# Altium PCB ZCTX-31main190715.PcbDoc (part 1 of 2)
Units mil, origin at the board's own origin, x right, y up, seen from the top; angles counter-clockwise.
Board outline 3653.54 x 5905.51 mil, 4 copper layers (Top Layer, GND, Mid-Layer 1, Bottom Layer); 117 components, 93 nets, 498 pads, 925 vias.
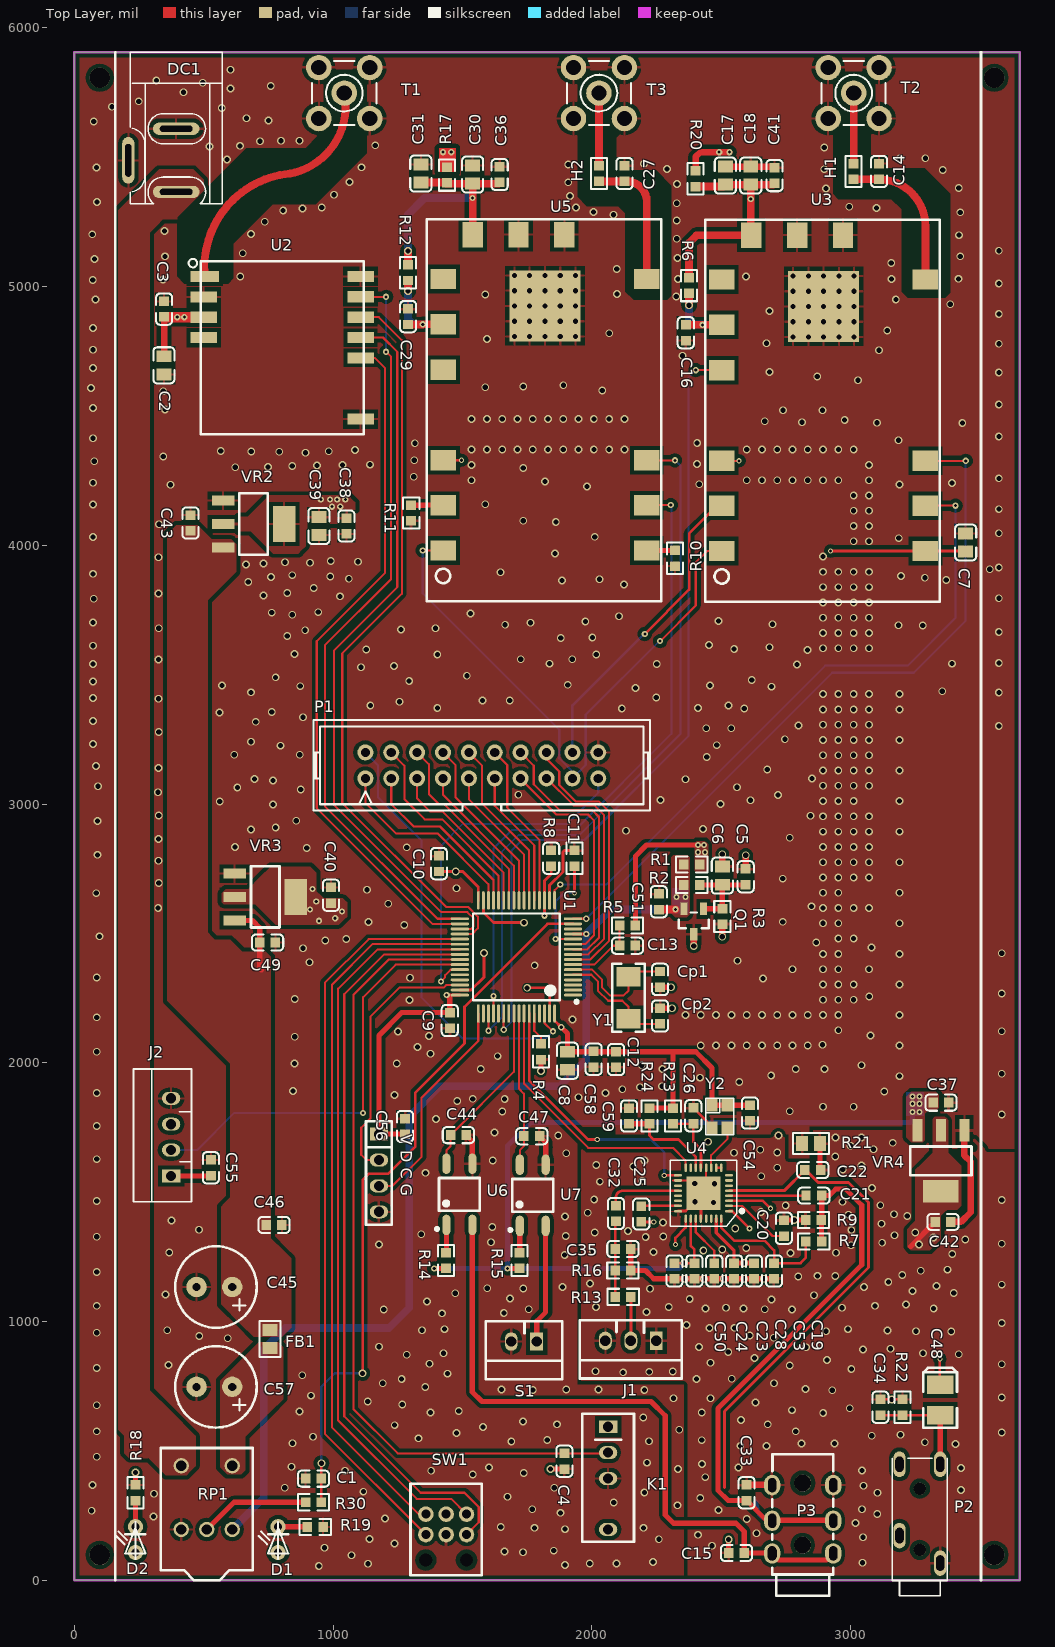
[diagram p0: Top Layer view]
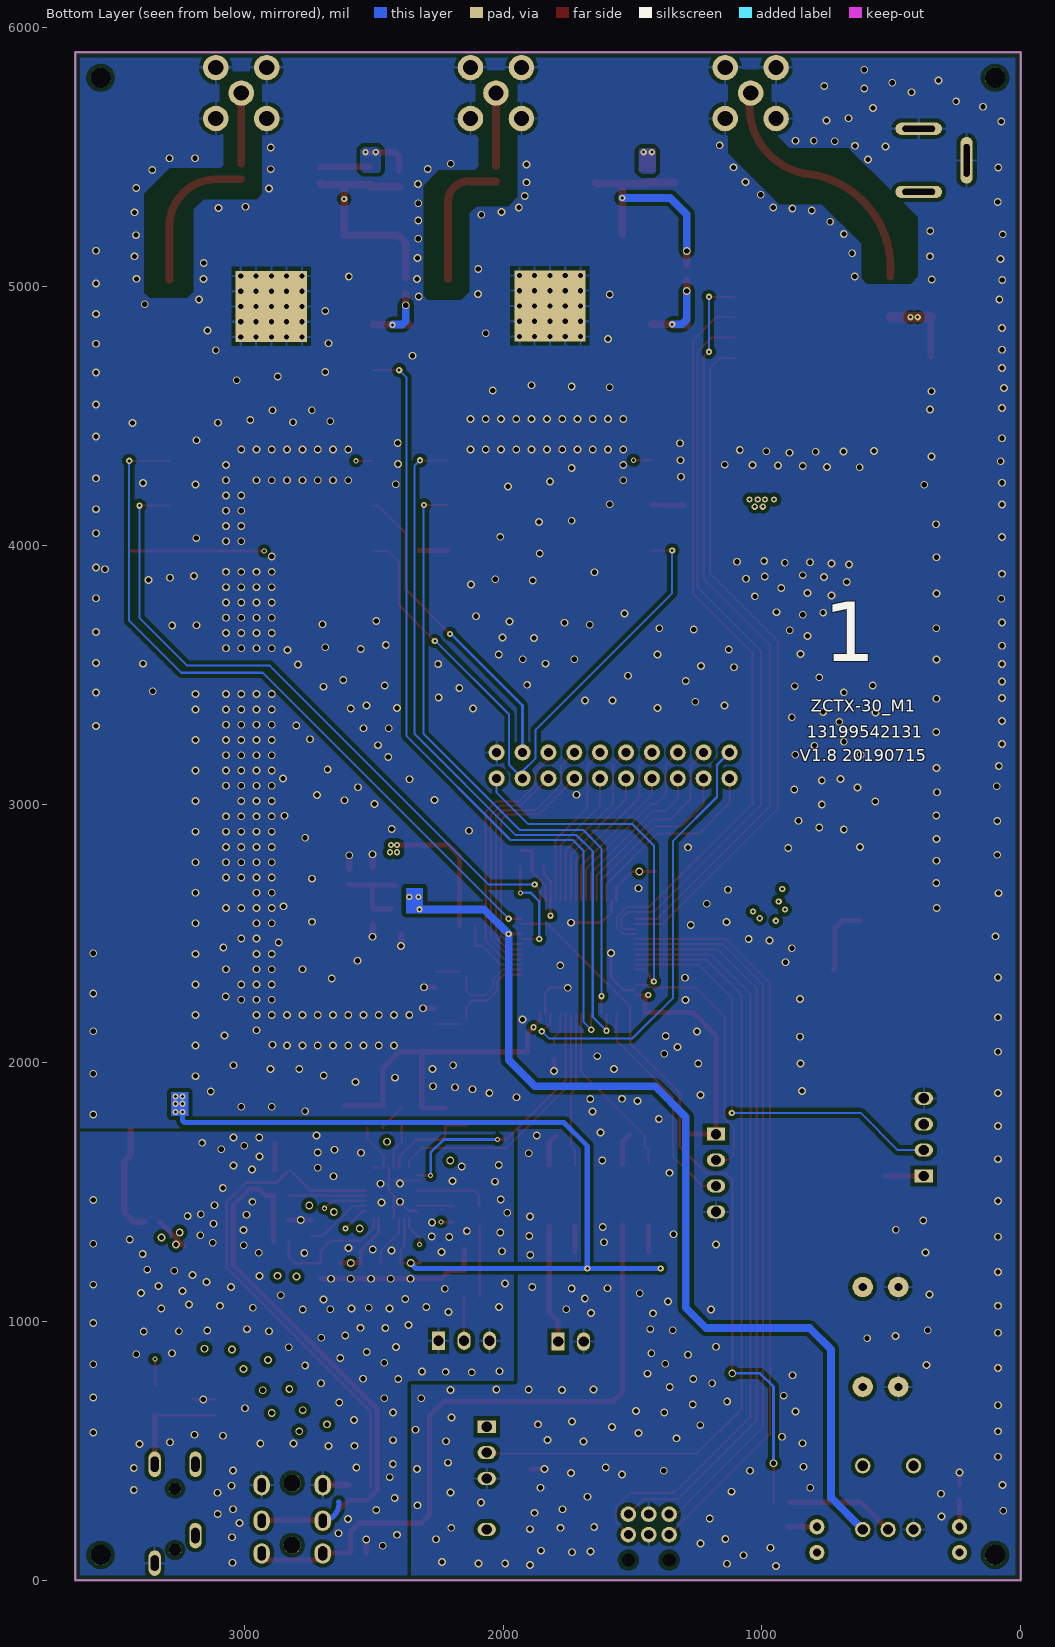
[diagram p1: Bottom Layer view, seen from below]
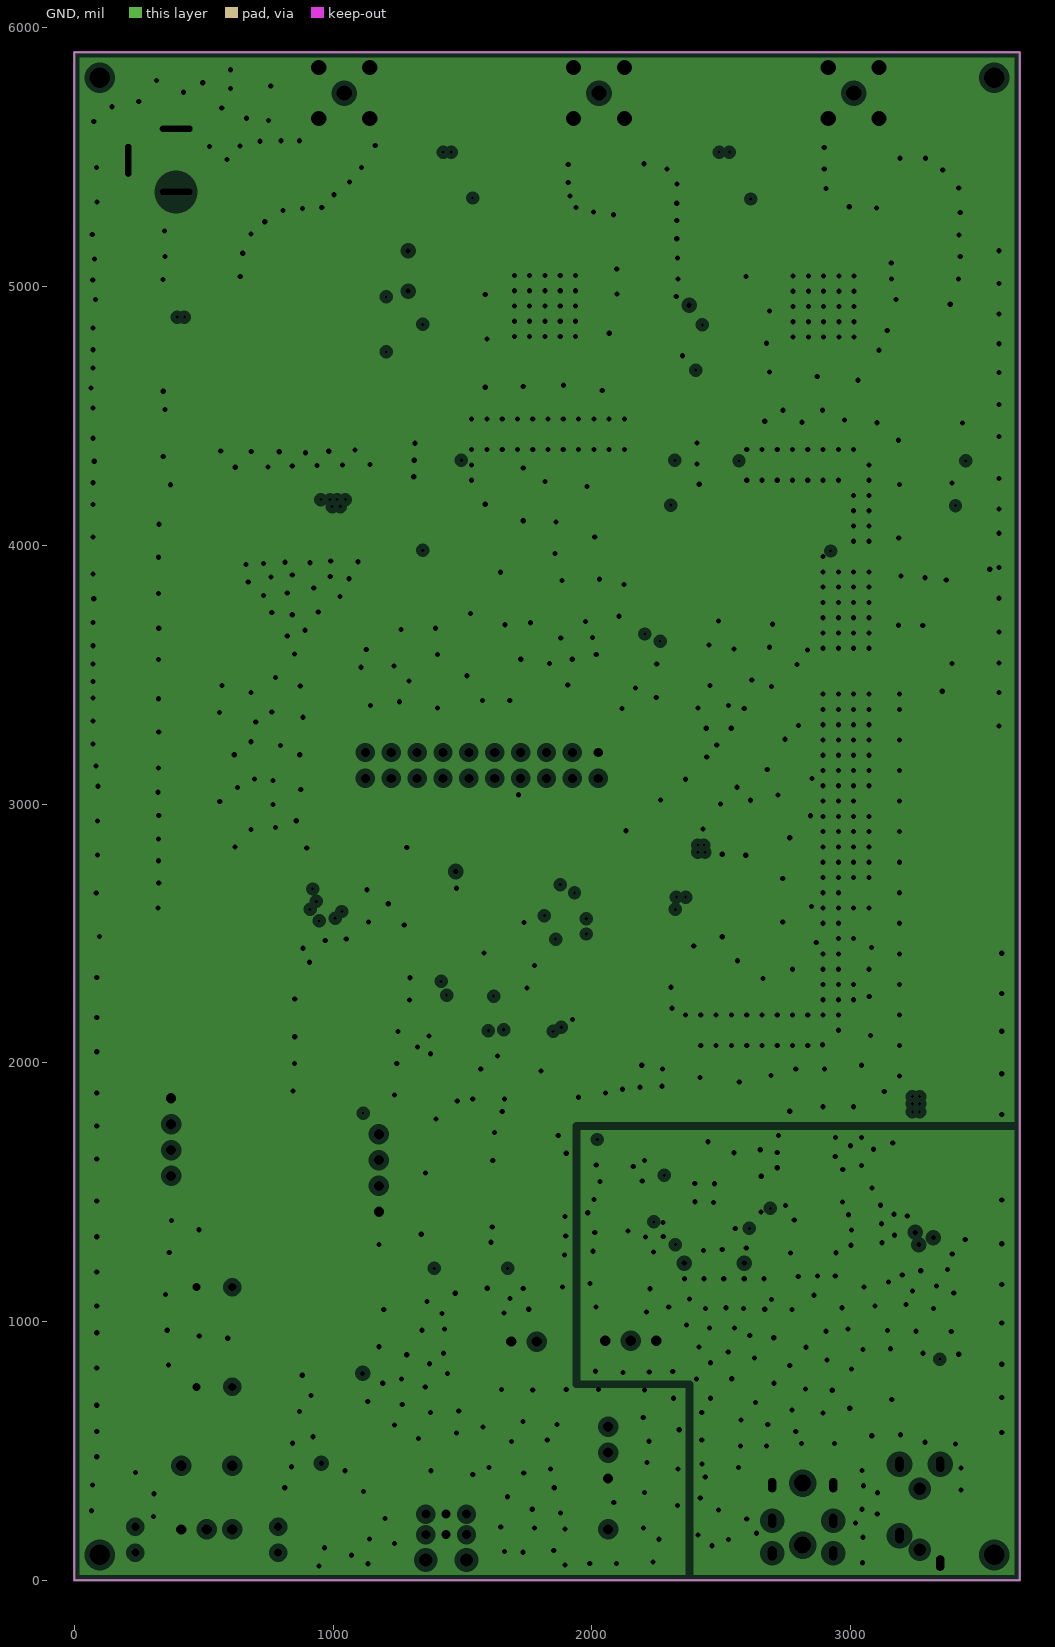
[diagram p2: GND, clearances drawn from the general rule]
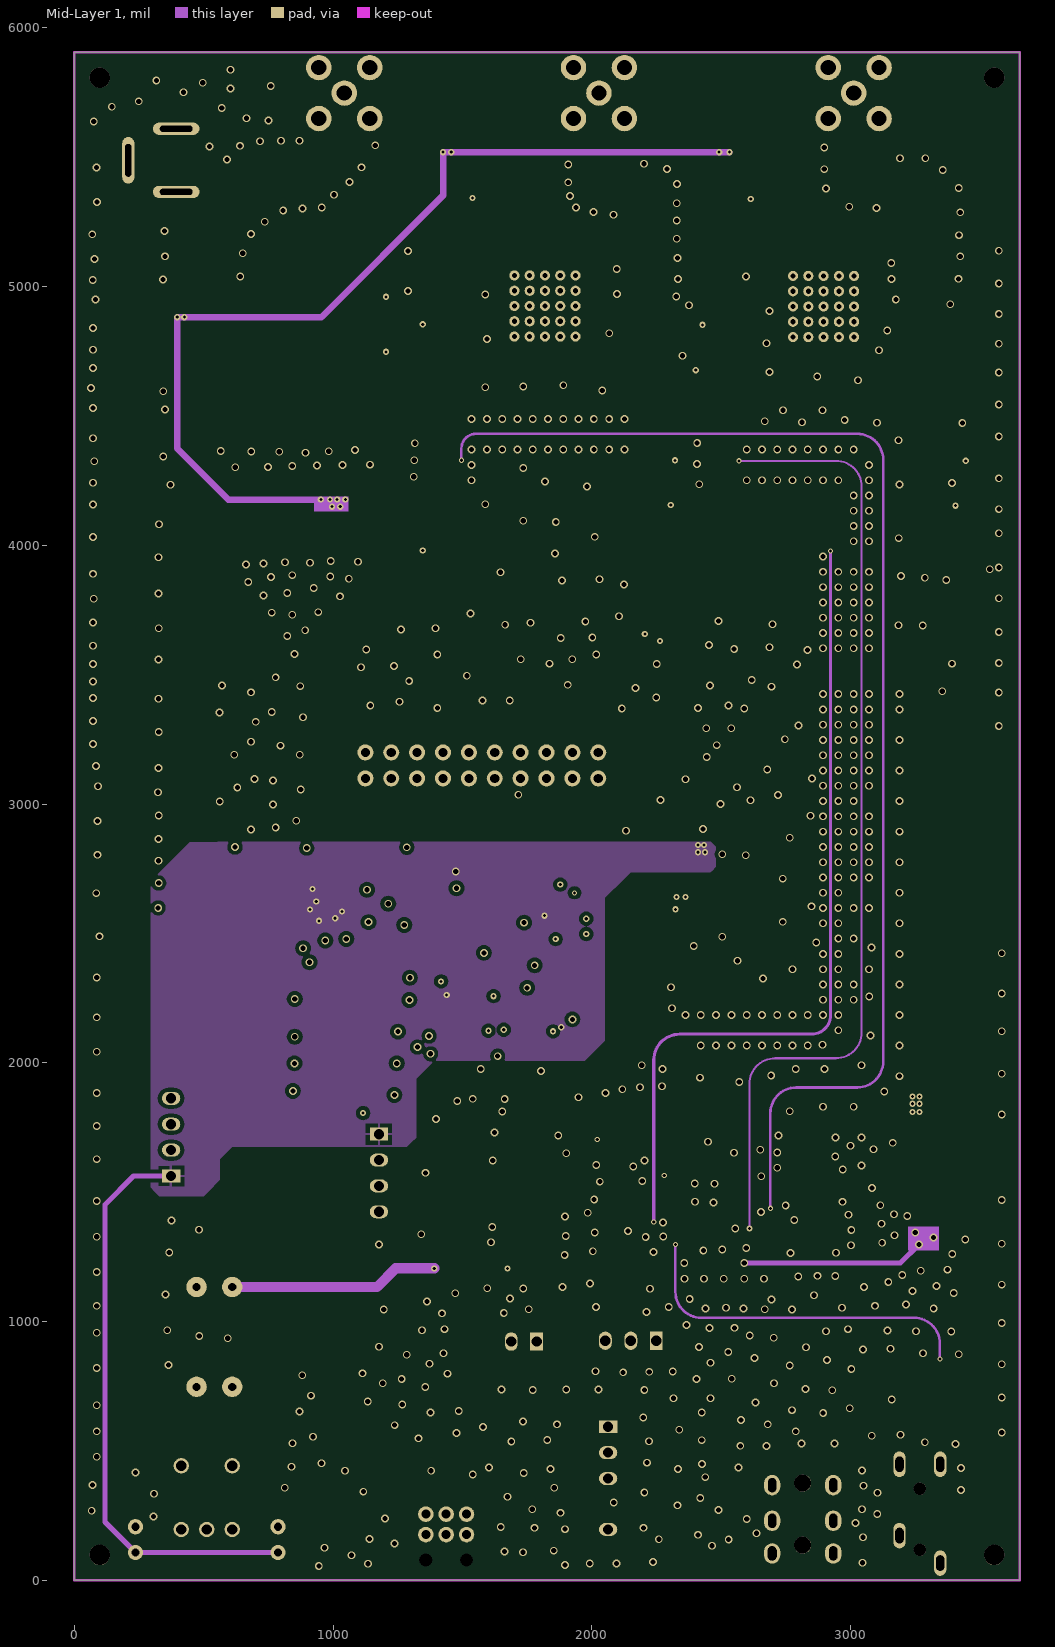
[diagram p3: Mid-Layer 1]
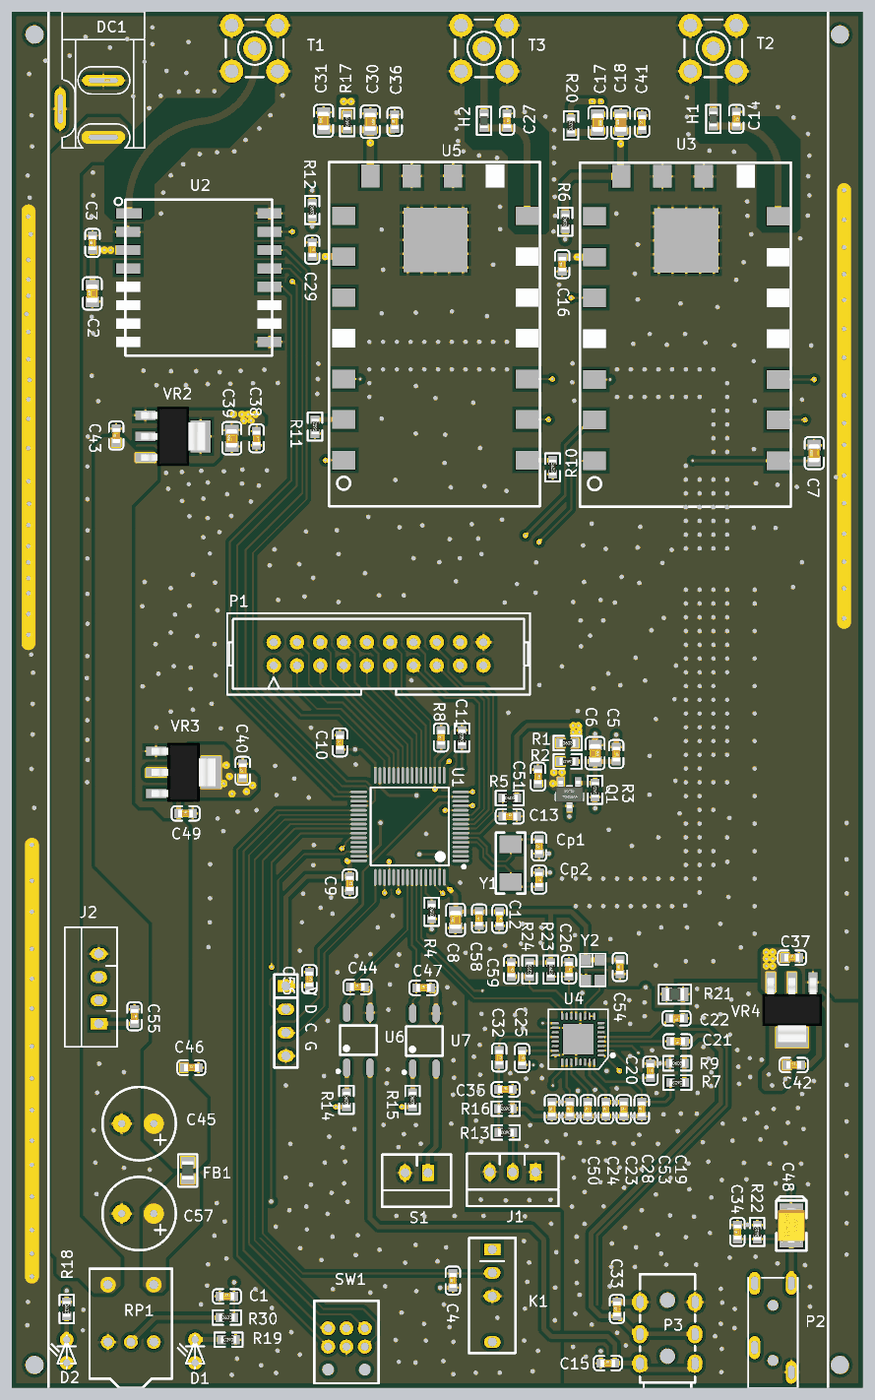
[diagram p5: 3D render of the assembled board from above, using the file's embedded part models]

## Layer stack, top to bottom
Top Layer: signal copper 1.4
Dielectric: core 12.6, FR-4, Dk 4.8
GND: plane copper 1.4, net (Multiple Nets)
Dielectric: prepreg 12.6, FR-4, Dk 4.8
Mid-Layer 1: signal copper 1.4
Dielectric: core 12.6, FR-4, Dk 4.8
Bottom Layer: signal copper 1.4

## Board outline
0,0 3653.54,0 3653.54,5905.51 0,5905.51

## Design rules (kind name [scope] priority, off if disabled: settings)
Clearance Clearance_1 [IsRegion] p1: gap=15
Clearance [All] p2: gap=5
DiffPairsRouting [All] p1: maxlimit=10 minlimit=10 mostfreqgap=10 maxuncoupledlength=500
FabricationTestpoint [(IsPad And (OnTopLayer Or OnBottomLayer))] p1: side=3 testpointundercomponent=TRUE minsize=40 maxsize=100 preferedsize=60 minholesize=0 maxholesize=40 preferedholesize=32 testpointgrid=1 allowsidetop=TRUE allowsidebottom=TRUE usegrid=TRUE gridtolerance=0.01
HoleSize [All] p1: absolutevalues=TRUE maxlimit=393.7 minlimit=1 maxpercent=80.000 minpercent=20.000
PlaneClearance [All] p1: clearance=20
PlaneConnect [All] p1: planeconnectstyle=Relief reliefexpansion=20 reliefentries=4 reliefconductorwidth=12 reliefairgap=10
PolygonConnect PolygonConnect_1 [IsVia] p1: connectstyle=Direct reliefconductorwidth=10 reliefentries=4 polygonreliefangle="90 Angle"
PolygonConnect [All] p2: connectstyle=Relief reliefconductorwidth=10 reliefentries=4 polygonreliefangle="90 Angle"
RoutingVias [All] p1: holewidth=12 width=24 viastyle="Through Hole" minholewidth=12 minwidth=24 maxholewidth=12 maxwidth=24
SilkscreenOverComponentPads SilkToSolderMaskClearance [IsPad] p1: minsilkscreentomaskgap=10
SolderMaskExpansion [All] p1: expansion=3.94
Width [All] p1: maxlimit=118.11 minlimit=6.69 preferedwidth=10 toplayer_minwidth=8 toplayer_maxwidth=100 toplayer_prefwidth=8 bottomlayer_minwidth=8 bottomlayer_maxwidth=100 bottomlayer_prefwidth=8
22 further rules are at their usual default settings.

## Classes and differential pairs
differential pair WM8978MIC: +WM8978MIC_P -WM8978MIC_N

## Components (designator, comment, footprint, x,y, rotation, side; value= is the part's Value field where it differs from the comment)
C1 "100nF (104) 10% 50V" 0603_C 924,393 r0 top
C2 "10uF (106) 10% 25V" 0805_C 346,4696 r90 top
C3 "100nF (104) 10% 50V" 0603_C 347,4913 r90 top
C4 "100nF (104) 10% 50V" 0603_C 1893.7,460.63 r90 top
C5 "100nF (104) 10% 50V" 0603_C 2594.81,2719.54 r270 top
C6 "10uF (106) 10% 25V" 0805_C 2504.26,2723.47 r270 top
C7 "100nF (104) 10% 50V" LC-0805_C 3444.88,4011 r90 top
C8 "10uF (106) 10% 25V" 0805_C 1905.51,2008.27 r90 top
C9 "100nF (104) 10% 50V" 0603_C 1451,2164 r270 top
C10 "100nF (104) 10% 50V" 0603_C 1409,2770 r90 top
C11 "100nF (104) 10% 50V" 0603_C 1843,2791 r90 top
C12 "100nF (104) 10% 50V" 0603_C 2094,2013 r270 top
C13 "1uF (105) 10% 50V" 0603_C 2137.8,2452.76 r0 top
C14 "2.0pF (020) 0.25pF 50V" 0603_C 3110.24,5444.88 r270 top
C15 "100nF (104) 10% 50V" 0603_C 2559.06,106.3 r0 top
C16 "100nF (104) 10% 50V" 0603_C 2363,4822 r90 top
C17 "10uF (106) 10% 25V" 0805_C 2515.75,5429.13 r270 top
C18 "100nF(104) 10% 50V" 0805_C 2614.17,5429.13 r90 top
C19 "4.7uF (475) 10% 16V" 0603_C 2704.26,1196 r90 top
C20 "1uF (105) 10% 50V" 0603_C 2742,1361 r270 top
C21 "1uF (105) 10% 50V" 0603_C 2858,1487 r180 top
C22 "1uF (105) 10% 50V" 0603_C 2854,1586 r180 top
C23 "4.7uF (475) 10% 16V" 0603_C 2473.1,1196 r90 top
C24 "4.7uF (475) 10% 16V" 0603_C 2396.05,1196 r90 top
C25 "10uF (106) 10% 10V" 0603_C 2191,1416 r270 top
C26 "4.7uF (475) 10% 16V" 0603_C 2392,1796 r270 top
C27 "2.0pF (020) 0.25pF 50V" 0603_C 2125.98,5437.01 r270 top
C28 "4.7uF (475) 10% 16V" 0603_C 2550.16,1196 r90 top
C29 "100nF (104) 10% 50V" 0603_C 1290,4884 r270 top
C30 "10uF (106) 10% 25V" 0805_C 1539.37,5433.07 r270 top
C31 "100nF(104) 10% 50V" 0805_C 1339,5437 r90 top
C32 "1uF (105) 10% 50V" 0603_C 2093,1418 r270 top
C33 "220pF (221) 10% 50V" 0603_C 2598.43,338.58 r90 top
C34 "220pF" 0603_C 3115,669 r90 top
C35 "10nF (103) 10% 50V" 0603_C 2120,1281 r0 top
C36 "100nF (104) 10% 50V" 0603_C 1644,5433 r90 top
C37 "100nF (104) 10% 50V" 0603_C 3349.12,1846.08 r0 top
C38 "100nF (104) 10% 50V" 0603_C 1051.18,4074.8 r270 top
C39 "10uF (106) 10% 25V" 0805_C 944.88,4074.8 r90 top
C40 "100nF (104) 10% 50V" 0603_C 992,2648 r90 top
C41 "100nF (104) 10% 50V" 0603_C 2706,5429 r90 top
C42 "100nF (104) 10% 50V" 0603_C 3356.99,1385.45 r0 top
C43 "100nF (104) 10% 50V" 0603_C 448.82,4086.61 r90 top
C44 "100nF (104) 10% 50V" 0603_C 1484.25,1720.47 r0 top
C45 "6.3V1000uF" C0.8 649.61,1133.86 r180 top
C46 "100nF (104) 10% 50V" 0603_C 771.65,1374.02 r0 top
C47 "100nF (104) 10% 50V" 0603_C 1767.72,1716.54 r0 top
C48 "220uF (107) ±10% 6.3V" CASE-B_3528 3346.46,696.85 r90 top
C49 "100nF (104) 10% 50V" 0603_C 747,2465 r0 top
C50 "10uF (106) 10% 10V" 0603_C 2319,1196 r90 top
C51 "100nF (104) 10% 50V" 0603_C 2259,2623 r270 top
C53 "100nF (104) 10% 50V" 0603_C 2627.21,1196 r90 top
C54 "100nF (104) 10% 50V" 0603_C 2611,1806 r90 top
C55 "100nF (104) 10% 50V" 0603_C 527.56,1594.49 r270 top
C56 "100nF (104) 10% 50V" 0603_C 1278,1754 r270 top
C57 "6.3V1000uF" C0.8 649.61,748.03 r180 top
C58 "100nF (104) 10% 50V" 0603_C 2007,2014 r90 top
C59 "4.7uF (475) 10% 16V" 0603_C 2144,1795 r270 top
Cp1 "20pF (200) 5% 50V" 0603_C 2263.78,2322.83 r90 top
Cp2 "20pF (200) 5% 50V" 0603_C 2263.78,2181.1 r270 top
D1 "LED1" LED 787.4,157.48 r90 top locked
D2 "LED1" LED 236.22,157.48 r90 top locked
DC1 "DC-10B" DC10B 216.54,5905.51 r270 top locked
FB1 "600Ω ±25% 100MHz" 0805_L 755.91,933.07 r90 top
H1 "15nH ±5%" 0603_L 3011.81,5444.88 r90 top
H2 "15nH ±5%" 0603_L 2027.56,5437.01 r90 top
J1 "SIP3" XH-3 2249,926 r180 top
J2 "SIP4" XH2.54-4P 374.02,1562.99 r90 top locked
K1 "KAGUAN" RS-8A 2062.99,393.7 r270 top locked
P1 "Header 10X2" JTAG_20 1574.8,3149.61 r0 top locked
P2 "PHONE4" PHONE4 3267.72,0 r90 top locked
P3 "PHONE3.5" PHONE_ST 2814.96,236.22 r270 top locked
Q1 "CJ431 0.5%431" SOT-23(SOT-23-3) 2394.02,2546.31 r90 top
R1 "100Ω (1000) ±1%" 0603_R 2386.15,2766.78 r0 top
R2 "2KΩ (2001) ±1%" 0603_R 2386.15,2688.04 r180 top
R3 "10KΩ (1002) ±1%" 0603_R 2504.26,2565.99 r90 top
R4 "4.7KΩ (4701) ±1%" 0603_R 1803.15,2043.31 r270 top
R5 "4.7KΩ (4701) ±1%" 0603_R 2138,2531 r0 top
R6 "4.7KΩ (4701) ±1%" 0603_R 2376,5004 r270 top
R7 "680Ω (6800) ±1%" 0603_R 2857.71,1310 r180 top
R8 "0Ω (0R0) ±1%" 0603_R 1933,2791 r90 top
R9 "47KΩ (4702) ±1%" 0603_R 2856.71,1393 r0 top
R10 "10Ω (10R0) ±1%" 0603_R 2322,3950 r270 top
R11 "10KΩ (1002) ±1%" 0603_R 1302,4125 r90 top
R12 "4.7KΩ (4701) ±1%" 0603_R 1290,5054 r270 top
R13 "2.2KΩ (2201) ±1%" 0603_R 2121,1096 r180 top
R14 "1KΩ (1001) ±1%" 0603_R 1437.01,1236.22 r270 top
R15 "1KΩ (1001) ±1%" 0603_R 1720.47,1236.22 r270 top
R16 "2.2KΩ (2201) ±1%" 0603_R 2120,1198 r180 top
R17 "0Ω (0R0) ±1%" 0603_R 1440,5431 r90 top
R18 "1KΩ (1001) ±1%" 0603_R 236.22,338.58 r270 top
R19 "1KΩ (1001) ±1%" 0603_R 931,207 r180 top
R20 "0Ω (0R0) ±1%" 0603_R 2401,5417 r90 top
R21 "600Ω ±25% 100MHz" 0805_L 2847,1689 r0 top
R22 "4.7KΩ (4701) ±1%" 0603_R 3200,669 r90 top
R23 "0Ω (0R0) ±1%" 0603_R 2314,1795 r270 top
R24 "0Ω (0R0) ±1%" 0603_R 2223,1795 r270 top
R30 "10KΩ (1002) ±1%" 0603_R 924,302 r0 top
RP1 "RV097NS" RV097NS 511.81,196.85 r0 top locked
S1 "SIP2" XH-2 1787,923 r180 top
SW1 "SIP6" XD_KG 1437.01,177.17 r0 top locked
T1 "SIP2" SMB_V-RJ45 1043.31,5748.03 r0 top locked
T2 "SIP2" SMB_V-RJ45 3011.81,5748.03 r0 top locked
T3 "SIP2" SMB_V-RJ45 2027.56,5748.03 r0 top locked
U1 "STM32F103RBT6" LQFP-64_10x10x05P 1708.66,2409.45 r90 top
U2 "Ra-01 Module" "Ra-01 Module" 803.15,4763.78 r0 top
U3 "SR_FRS_1WV" SR_FRS_1W 2501.97,3978.35 r0 top
U4 "WM8978" QNF32 2530.08,1427.43 r180 top
U5 "SR_FRS_1WV" SR_FRS_1W 1425.2,3980.32 r0 top
U6 "EL357N(B)(TA)-G" SOP-4_P2.54 1488.19,1492.13 r90 top
U7 "EL357N(B)(TA)-G" SOP-4_P2.54 1771.65,1488.19 r90 top
"V D C G" "SIP4" SIP4 1177.17,1724.41 r270 top
VR2 "AMS1117-3.3" SOT-223 692.91,4082.68 r180 top
VR3 "AMS1117-3.3" SOT-223 737.83,2641.25 r180 top
VR4 "AMS1117-3.3" SOT-223 3349.12,1621.67 r90 top
Y1 "8MHz ±20ppm 20pF" SMD-5032_2P 2141.73,2251.97 r270 top
Y2 "12.288M" XTAL4TN_3225 2494,1793 r270 top

## Footprints (in the part's own frame and the unit in brackets; to place one, negate y for a bottom-side part, rotate by r counter-clockwise, add the part's x,y. Pads: shape width x height; smd on the part's side, far side on the other; paste and mask are expansions set on the pad)
0603_C [mm]
  rect 0.93x0.98 smd: 1(-0.77,0) 2(0.77,0)
  silkscreen extent -1.53,-0.79 1.54,0.79, body extent -0.8,-0.4 0.8,0.4, height 0.3
0603_L [mm]
  rect 0.93x0.98 smd: 1(-0.77,0) 2(0.77,0)
  silkscreen extent -1.53,-0.79 1.54,0.79, body extent -0.82,-0.41 0.82,0.41, height 0.46
0603_R [mm]
  rect 0.93x0.98 smd: 1(-0.77,0) 2(0.77,0)
  silkscreen extent -1.53,-0.79 1.54,0.79, body extent -0.85,-0.4 0.85,0.4, height 0.56
0805_C [mm]
  rect 1.16x1.47 smd: 1(-0.89,0) 2(0.89,0)
  silkscreen extent -1.77,-1.04 1.77,1.04, body extent -1,-0.63 1,0.63, height 0.77
0805_L [mm]
  rect 1.16x1.47 smd: 1(-0.89,0) 2(0.89,0)
  silkscreen extent -1.77,-1.04 1.77,1.03, body extent -1,-0.64 1,0.64, height 0.6
C0.8 [mm]
  round 2 hole 0.8: 1(1,0) 2(4.5,0)
  silkscreen extent -1.4,-4 6.6,4
CASE-B_3528 [mm]
  rect 1.8x2.6 smd: 1(1.5,0) 2(-1.5,0)
  silkscreen extent -2.73,-1.65 3.16,1.65, body extent -1.85,-1.47 1.85,1.46, height 2.03
DC10B [mm]
  oval 1.2x4.572 hole 0.6 slot 3.2 at 90 deg: 1(13.7,4.5) 2(7.5,4.5)
  oval 4.572x1.2 hole 0.6 slot 3.2 at 0 deg: 3(10.6,-0.2)
  silkscreen extent 0,0 14.87,9
JTAG_20 [mil]
  round 62 hole 35: 1(-450,-50) 2(-450,50) 3(-350,-50) 4(-350,50) 5(-250,-50) 6(-250,50) 7(-150,-50) 8(-150,50) 9(-50,-50) 10(-50,50) 11(50,-50) 12(50,50) 13(150,-50) 14(150,50) 15(250,-50) 16(250,50) 17(350,-50) 18(350,50) 19(450,-50) 20(450,50)
  silkscreen extent -650,-175 650,175
LC-0805_C [mm]
  rect 1.16x1.47 smd: 1(-0.875,0) 2(0.875,0)
  silkscreen extent -1.76,-1.04 1.76,1.04, body extent -1,-0.63 1,0.63, height 0.77
LED [mm]
  round 1.5 hole 0.8: 1(-1.27,0) 2(1.27,0)
  silkscreen extent -1.88,-1 1.71,1.9
LQFP-64_10x10x05P [mm]
  oval 0.28x1.8 smd mask+0.051: 1(-3.75,-5.55) 2(-3.25,-5.55) 3(-2.75,-5.55) 4(-2.25,-5.55) 5(-1.75,-5.55) 6(-1.25,-5.55) 7(-0.75,-5.55) 8(-0.25,-5.55) 9(0.25,-5.55) 10(0.75,-5.55) 11(1.25,-5.55) 12(1.75,-5.55) 13(2.25,-5.55) 14(2.75,-5.55) 15(3.25,-5.55) 16(3.75,-5.55) 33(3.75,5.55) 34(3.25,5.55) 35(2.75,5.55) 36(2.25,5.55) 37(1.75,5.55) 38(1.25,5.55) 39(0.75,5.55) 40(0.25,5.55) 41(-0.25,5.55) 42(-0.75,5.55) 43(-1.25,5.55) 44(-1.75,5.55) 45(-2.25,5.55) 46(-2.75,5.55) 47(-3.25,5.55) 48(-3.75,5.55)
  oval 1.8x0.28 smd mask+0.051: 17(5.55,-3.75) 18(5.55,-3.25) 19(5.55,-2.75) 20(5.55,-2.25) 21(5.55,-1.75) 22(5.55,-1.25) 23(5.55,-0.75) 24(5.55,-0.25) 25(5.55,0.25) 26(5.55,0.75) 27(5.55,1.25) 28(5.55,1.75) 29(5.55,2.25) 30(5.55,2.75) 31(5.55,3.25) 32(5.55,3.75) 49(-5.55,3.75) 50(-5.55,3.25) 51(-5.55,2.75) 52(-5.55,2.25) 53(-5.55,1.75) 54(-5.55,1.25) 55(-5.55,0.75) 56(-5.55,0.25) 57(-5.55,-0.25) 58(-5.55,-0.75) 59(-5.55,-1.25) 60(-5.55,-1.75) 61(-5.55,-2.25) 62(-5.55,-2.75) 63(-5.55,-3.25) 64(-5.55,-3.75)
  silkscreen extent -4.55,-6.05 4.25,4.25
PHONE4 [mm]
  round 1.2 hole 1.2: 0(3,0) 0(9,0)
  oval 2.5x1.2 hole 0.8 slot 1.5 at 0 deg: 2(1.7,-2) 3(4.4,2) 4(11.4,-2) 5(11.4,2)
  silkscreen extent -1.5,-2.7 12,2.7
PHONE_ST [mm]
  round 1.676 hole 1.676: 0(-3.556,0) 0(2.54,0)
  oval 2x1.6 hole 0.8 slot 1.4 at 0 deg: 1(-3.35,3) 1(-3.35,-3) 2(0.15,3) 2(0.15,-3) 3(3.35,3)
  oval 2x1.6 hole 0.87 slot 1.4 at 0 deg: 3(3.35,-3)
  silkscreen extent -6.39,-3.01 7.49,3
QNF32 [mm]
  oct 0.8x0.25 smd: 1(0,0) 2(0,-0.5) 3(0,-1) 4(0,-1.5) 5(0,-2) 6(0,-2.5) 7(0,-3) 8(0,-3.5) 17(5,-3.5) 18(5,-3) 19(5,-2.5) 20(5,-2) 21(5,-1.5) 22(5,-1) 23(5,-0.5) 24(5,0)
  oct 0.25x0.8 smd: 9(0.75,-4.25) 10(1.25,-4.25) 11(1.75,-4.25) 12(2.25,-4.25) 13(2.75,-4.25) 14(3.25,-4.25) 15(3.75,-4.25) 16(4.25,-4.25) 25(4.25,0.75) 26(3.75,0.75) 27(3.25,0.75) 28(2.75,0.75) 29(2.25,0.75) 30(1.75,0.75) 31(1.25,0.75) 32(0.75,0.75)
  rect 3.3x3.3 smd: 33(2.5,-1.75)
  silkscreen extent -1.47,-5 5.75,1.5
"Ra-01 Module" [mm]
  rect 2.8x1.1 smd: 1(-7.6,7.002)
  rect 2.6x1.1 smd: 2(-7.7,4.99) 3(-7.7,3.002) 4(-7.7,1.002) 9(7.7,-6.998) 12(7.7,-0.998) 13(7.7,1.002) 14(7.7,3.002) 15(7.7,5.002) 16(7.7,6.996)
  rect 2.6x1.1 on Top Overlay: 5(-7.7,-0.998) 6(-7.7,-2.998) 7(-7.7,-4.998) 8(-7.7,-6.998) 10(7.7,-4.998) 11(7.7,-2.998)
  silkscreen extent -9.18,-8.5 8,8.72
RS-8A [mm]
  rect 1.27x1.8 hole 1: 1(-5.08,0)
  oval 1.27x1.8 hole 1: 2(-2.54,0) 3(0,0) 5(5,0)
  silkscreen extent -6.35,-2.54 6.21,2.54
RV097NS [mm]
  round 1.5 hole 1: 1(-2.5,6.25) 2(2.5,6.25) 11(-2.5,0) 12(0,0) 13(2.5,0)
  silkscreen extent -4.5,-5 4.5,8
SIP4 [mm]
  rect 1.27x1.8 hole 1: 1(0,0)
  oval 1.27x1.8 hole 1: 2(2.54,0) 3(5.08,0) 4(7.62,0)
  silkscreen extent -1.27,-1.27 8.89,1.27
SMB_V-RJ45 [mm] "Connector; SMB Straight"
  round 2.5 hole 1.5: 1(0,0) 2(-2.5,-2.5) 2(-2.5,2.5) 2(2.5,-2.5) 2(2.5,2.5)
  silkscreen extent -3.15,-3.15 3.15,3.15
SMD-5032_2P [mm]
  rect 1.9x2.4 smd: 1(-2.05,0) 2(2.05,0)
  silkscreen extent -3.32,-1.6 3.32,1.6
SOP-4_P2.54 [mm]
  oval 2x0.8 smd: 1(-3,1.27) 2(-3,-1.27) 3(3,-1.27) 4(3,1.27)
  silkscreen extent -3.55,-2 1.6,2.35
SOT-23(SOT-23-3) [mm]
  rect 1.25x0.7 smd: 1(1.25,-0.95) 2(1.25,0.95) 3(-1.25,0)
  silkscreen extent -0.65,-1.46 0.9,1.46, body extent -1.5,-1.5 1.5,1.5, height 1.3
SOT-223 [mm]
  rect 2.2x1 smd: 1(3,-2.3) 2(3,0) 3(3,2.3)
  rect 2.2x3.5 smd: 2(-3,0)
  silkscreen extent -1.4,-3 1.4,3, body extent -3.49,-3.24 3.49,3.24, height 1.64
SR_FRS_1W [mm]
  rect 2.5x2 smd: 1(0,0) 2(0,4.45) 3(0,8.85) 5(0,17.75) 6(0,22.2) 7(0,26.65) 12(20,26.65) 16(20,8.85) 17(20,4.45) 18(20,0)
  rect 2.5x2 on Top Overlay: 4(0,13.3) 13(20,22.2) 14(20,17.75) 15(20,13.3)
  rect 2x2.5 smd: 8(2.9,31) 9(7.4,31) 10(11.9,31)
  round 1 hole 0.5: 9(7,21) 9(7,22.5) 9(7,24) 9(7,25.5) 9(7,27) 9(8.5,21) 9(8.5,22.5) 9(8.5,24) 9(8.5,25.5) 9(8.5,27) 9(10,21) 9(10,22.5) 9(10,24) 9(10,25.5) 9(10,27) 9(11.5,21) 9(11.5,22.5) 9(11.5,24) 9(11.5,25.5) 9(11.5,27) 9(13,21) 9(13,22.5) 9(13,24) 9(13,25.5) 9(13,27)
  rect 7x7 smd: 9(10,24.003)
  rect 7x7 smd far side: 9(10,24.003)
  rect 2x2.5 on Top Overlay: 11(16.5,31)
  silkscreen extent -1.6,-5 21.4,32.5
XD_KG [mil]
  round 60 hole 35: 1(-78.74,0) 2(0,0) 3(78.74,0) 4(-78.74,78.74) 5(0,78.74) 6(78.74,78.74)
  round 0 hole 51.18: 7(-78.74,-98.43) 8(78.74,-98.43)
  silkscreen extent -138,-157 138,197
XH2.54-4P [mm]
  rect 1.27x1.8 hole 1: 1(0,0)
  oval 1.27x1.8 hole 1: 2(2.54,0) 3(5.08,0) 4(7.62,0)
  silkscreen extent -2.54,-2 10.5,3.7
XH-2 [mm]
  rect 1.27x1.8 hole 1: 1(0,0)
  oval 1.27x1.8 hole 1: 2(2.5,0)
  silkscreen extent -2.5,-2 5,3.7
XH-3 [mm]
  rect 1.27x1.8 hole 1: 1(0,0)
  oval 1.27x1.8 hole 1: 2(2.5,0) 3(5,0)
  silkscreen extent -2.5,-2 7.5,3.7
XTAL4TN_3225 [mm]
  rect 1.2x1.1 smd: 1(-1.1,-0.75) 2(1.1,-0.75) 3(1.1,0.75) 4(-1.1,0.75)
  silkscreen extent -1.8,-1.38 1.79,1.4

## Part data
C1 C4 C5 C7 C15 C34 C37 C38 C40 C42 C43 C44 C46 C47 C49 C51 C53 C54 C55 C58: library part "0603 100nF (104) 10% 50V", "贴片电容"
C2 C6 C8 C17 C30 C39: library part "0805 10uF (106) 10% 25V", "贴片电容"
C3 C16 C29 C36 C41 C56: library part "0603 100nF (104) 10% 50V", "贴片"
C9 C10 C11 C12 C35: library part "0603 10nF (103) 10% 50V", "贴片电容"
C13 C20 C21 C22 C32: library part "0603 1uF (105) 10% 50V", "贴片电容"
C14 C27: library part "0603 2.0pF (020) 0.25pF 50V", "贴片电容"
C18 C31: library part "0805 100nF(104) 10% 50V", "贴片电容"
C19 C23 C24 C26 C28 C59: library part "0603 4.7uF (475) 10% 16V", "贴片电容"
C25 C50: library part "0603 10uF (106) 10% 10V", "贴片电容"
C33: library part "0603 220pF (221) 10% 50V", "贴片电容"
C45 C57: library part C+
C48: library part "3528 100uF (107) 10% 6.3V", "钽电容"
Cp1 Cp2: library part "0603 20pF (200) 5% 50V", "贴片电容"
FB1 R21: library part "0805 600Ω 25% 100MHz", "贴片磁珠"
H1 H2: library part "0603 12nH 5%", "贴片电感"
P1: "Header, 10-Pin, Dual row"
P3: library part PHONE3
Q1: "电压基准"
R1: library part "0603 100Ω (1000) 1%", "贴片电阻"
R2: library part "0603 2KΩ (2001) 1%", "贴片电阻"
R3 R30: library part "0603 10KΩ (1002) 1%", "贴片电阻"
R4 R5 R22: library part "0603 4.7KΩ (4701) 1%", "贴片电阻"
R6 R12: library part "0603 4.7KΩ (4701) 1", "贴片"
R7: library part "0603 680Ω (6800) 1%", "贴片电阻"
R8 R23 R24: library part "0603 0Ω (0R0) 1%", "贴片电阻"
R9: library part "0603 47KΩ (4702) 1%", "贴片电阻"
R10: library part "0603 10Ω (10R0) 1", "贴片"
R11: library part "0603 10KΩ (1002) 1", "贴片"
R13 R16: library part "0603 2.2KΩ (2201) 1%", "贴片电阻"
R14 R15 R18 R19: library part "0603 1KΩ (1001) 1%", "贴片电阻"
R17 R20: library part "0603 0Ω (0R0) 1", "贴片"
U1: "ARM"
U6 U7: library part EL357N(B)(TA)-G_[C6649], "贴片光耦"
VR2 VR3 VR4: library part "SOT-223 AMS1117-3.3", "低压差线性稳压(LDO)"
Y1: library part "SMD-5032_2P 8MHz 20ppm 20pF", "贴片晶振"
Y2: library part X3225-4P

## Free pads (board coordinates)
  round 78.74 hole 78.74: 0(98.43,98.43) 0(98.43,5807.09) 0(3555.12,98.43) 0(3555.12,5807.09)

## Via types
v1: diameter 30, hole 20, Top Layer to Bottom Layer, tented both sides, 854 vias
v2: diameter 24, hole 12, Top Layer to Bottom Layer, 61 vias
v3: diameter 20, hole 12, Top Layer to Bottom Layer, tented both sides, 10 vias

## Nets (pads, with @x,y where several pads share a name; then routed paths per layer and width w, separated by ;. In a path a pad name is that pad's centre, name@x,y a point inside that pad or via, vN(x,y) a via of type N, cw(c..) or ccw(c..) an arc to the next point about the centre after c; other vN are vias at no path point)
ADC1: C1.2 R30.2 U1.15 | length 2803.1
  Top Layer w10: R30.2@954.32,302 C1.2@954.32,393 954.32,452.31 v1(955,453) ; v1(1114.17,800.17) 1114.17,1547.24 1137.8,1570.87 1212.6,1570.87 1318,1676.27 1318,1884.93 1507.87,2074.8 1507.87,2216.54 1828.74,2537.4 U1.15@1927.17,2537.4
  Bottom Layer w10: v1(955,453) 955,749 1006.17,800.17 v1(1114.17,800.17)
AF_OUT1: U3.3 U4.1 | length 3919.2
  Top Layer w8: U3.3@2501.97,4326.77 v3(2568.77,4326.77)
  Top Layer w10: U4.1@2530.08,1427.43 2541.89,1427.43 v2(2608.82,1360.5)
  Mid-Layer 1 w8: v3(2568.77,4326.77) 2943,4326.77 cw(c2943,4226.77) 3043,4226.77 3043,2118 cw(c2943,2118) 2943,2018 2708.82,2018 ccw(c2708.82,1918) 2608.82,1918 v2(2608.82,1360.5)
AF_OUT2: U4.3 U5.3 | length 5250.6
  Top Layer w10: U5.3@1425.2,4328.74 v3@1495.74,4328.74 ; U4.3@2530.08,1466.8 2661.2,1466.8 v3(2690,1438)
  Mid-Layer 1 w10: v3(1496,4329) 1496,4375 cw(c1552,4375) 1552,4431 3026,4431 cw(c3026,4331) 3126,4331 3126,2005 cw(c3026,2005) 3026,1905 2790,1905 ccw(c2790,1805) 2690,1805 v3(2690,1438)
AGND: C15.1 C19.1 C20.1 C22.1 C23.1 C24.1 C28.1 C33.2 C34.2 C35.2 C50.1 C53.1 J1.1 J1.3 P2.2 P3.1 R9.1 R16.1 R21.2 R22.2 U4.12 U4.18 U4.24 U4.28 U4.33 | length 1486.4
  Top Layer w9: 2313.54,1545.54 U4.18@2333.23,1545.54 U4.33@2418.38,1545.54 ; U4.33@2441.5,1506.17 U4.12@2441.5,1594.76
  Top Layer w10: U4.24@2333.23,1427.43 2362.76,1427.43 U4.33@2421.81,1486.49 ; U4.28@2421.81,1397.91 U4.33@2421.81,1486.49 ; U4.33@2431.65,1496.33 U4.33@2421.81,1486.49 ; C34.2@3115,699.31 R22.2@3200,699.32
  Top Layer w20: C35.2@2150.32,1281 R16.1@2150.31,1198 2207,1198 2239.32,1165.69 C50.1@2319,1165.69 C24.1@2396.05,1165.69 C23.1@2473.1,1165.69 C28.1@2550.16,1165.69 C53.1@2627.21,1165.69 C19.1@2704.26,1165.69 ; C15.1@2528.74,106.3 v1(2528.74,157.74) ; R9.1@2826.39,1393 C20.1@2743.68,1393 ; R21.2@2882.04,1689 2882.04,1588.28 C22.1@2884.32,1586 ; C20.1@2743.68,1393 ccw(c2743.68,1391.31) C20.1@2742,1391.31 cw(c2743.68,1391.31) C20.1@2743.68,1393
  Top Layer w25: C33.2@2598.43,368.9 2696.06,368.9 P3.1@2696.85,368.11
  other v1: 3046,68 2464.92,133.66 3048,167 2410,176 2636,182 3019,222 2599,237 3103,257 2490,272 3044,275 2419,318 3104,339 3427,349 3050,366 2438,399 3044,425 3427,434 2567,436 2426,450 2675,519 2574,520 3405,527 2810,529 2938,529 3287,534 2425,542 3082,559 3193,563 3584,572 2788,576 2680,603 2576,620 2894,647 2425,649 2774,658 2997,665 2633,688 3159,699.31 2459,704 3584,707 2929,735 2826,740 2704,762 2405,778 2541,779 2121,804 2222,806 2313,807 2014,808 3003,817 2765,830 3584,835 2459,841 2909,852 2629,859 3418,874 3280,878 2527,883 3048,892 3154,895 2828,901 2414,902 2703,938 2610,946 3389,962 2905,963 3253,963 3143,966 2990,971 2455,975 2551,976 2366,987 3584,995 2211,1037 2774,1047 2668,1048 2439,1051 2586,1051 3321,1051 2519,1054 2967,1054 2016,1057 2297,1057 3094,1061 3214,1066 2694,1086 2378,1087 2859,1102 3399,1111 3239,1118 2225,1127 3052,1134 3332,1138 3584,1143 1993,1147 3146,1153 2358,1165.69 2434,1165.69 2510,1165.69 2589,1165.69 2665,1165.69 2798,1174 2941,1176 2872,1177 3200,1180 3271,1197 3375,1201 3393,1261 2768,1265 2944,1266 2238,1269 2004,1272 2431,1275 2504,1279 2597,1285 3002,1295 3584,1301 3122,1305 3443,1317 2208,1327 2276,1329 3170,1334 2011,1344 2140,1350 3003,1354 2554,1360 3119,1378 2275,1383 2782,1393 3219,1408 2992,1413 3168,1415 1984,1421 2654,1424 2749,1449 3115,1450 2470,1460 2969,1463 2398.39,1463.06 3584,1470 2009,1472 3083,1516 2474,1533 2398,1534 2031,1541 2195,1544 2655,1562 2970,1588 2716.54,1594.49 2160,1600 3042,1603 2017,1605 2204,1623 2941,1638 2549,1653 2716.54,1653.54 2651,1664 3089,1666 3000,1680 3163,1691 2449,1695 2942,1712 3042,1712 2721,1719
AUX_IN: C32.1 U4.20 | length 286.4
  Top Layer w10: C32.1@2093,1448.31 2093,1479 cw(c2120,1479) 2120,1506 cw(c2120.17,1506) 2120.17,1506.17 U4.20@2333.23,1506.17
CON1: SW1.1 U1.37 | length 2885.4
  Top Layer w8: SW1.1@1358.27,177.17 968.5,566.93 968.5,2309.5 1137.35,2478.35 U1.37@1490.16,2478.35
CON2: SW1.3 U1.40 | length 2932.8
  Top Layer w8: U1.40@1490.16,2419.29 1197.29,2419.29 1043.31,2265.31 1043.31,633.86 1338.58,338.58 1507.87,338.58 1562.99,283.46 1562.99,224.41 SW1.3@1515.75,177.17
CON3: SW1.4 U1.38 | length 2771.9
  Top Layer w8: SW1.4@1358.27,255.91 1330.71,255.91 996.06,590.55 996.06,2303.06 1151.66,2458.66 U1.38@1490.16,2458.66
CON4: SW1.6 U1.39 | length 2848.2
  Top Layer w8: U1.39@1490.16,2438.98 1171.98,2438.98 1019.68,2286.69 1019.68,618.11 1322.83,314.96 1456.69,314.96 SW1.6@1515.75,255.91
FRS_RXD1: U1.16 U3.16 | length 2768.3
  Top Layer w8: U1.16@1927.17,2557.09 v2(1978.35,2557.09) ; U3.16@3289.37,4326.77 v2(3444.88,4326.77)
  Bottom Layer w8: v2(1978.35,2557.09) 2929.13,3507.87 3244.09,3507.87 3444.88,3708.66 v2(3444.88,4326.77)
FRS_RXD2: U1.51 U5.16 | length 2833.9
  Top Layer w8: v2(1600.39,2124.02) U1.51@1600.39,2190.94 ; U5.16@2212.6,4328.74 v2(2320.87,4328.74)
  Bottom Layer w8: v2(1600.39,2124.02) 1653.54,2177.17 1653.54,2817.54 1716.07,2880.07 1950.93,2880.07 2342.52,3271.65 2342.52,4307.09 v2(2320.87,4328.74)
FRS_TXD1: U1.17 U3.17 | length 2574
  Top Layer w8: U1.17@1856.3,2627.95 1856.3,2667.32 v2(1877.95,2688.98) ; U3.17@3289.37,4153.54 v2(3405.51,4153.54)
  Bottom Layer w8: v2(1877.95,2688.98) 2055.12,2688.98 2901.57,3535.43 3220.47,3535.43 3405.51,3720.47 v2(3405.51,4153.54)
FRS_TXD2: U1.52 U5.17 | length 2483.2
  Top Layer w8: U1.52@1620.08,2190.94 v2(1620.08,2257.87) ; U5.17@2212.6,4155.51 v2(2305.12,4155.51)
  Bottom Layer w8: v2(1620.08,2257.87) 1620.08,2829.08 1690.85,2899.85 1935.29,2899.85 2307.46,3272.03 2307.46,4153.17 v2@2307.09,4153.54
G1: P1.2 U1.62 | length 1706.2
  Top Layer w8: U1.62@1816.93,2190.94 1816.93,2153.54 1848.43,2122.04 v2(1850.39,2122.04)
  Bottom Layer w8: P1.2@1124.8,3199.61 1173.23,3151.18 1173.23,3027.56 1342.52,2858.27 1342.52,2251.97 1500,2094.49 1822.84,2094.49 v2(1850.39,2122.04)
G2: P1.4 U1.28 | length 782.7
  Top Layer w8: P1.4@1224.8,3199.61 1275.59,3148.82 1275.59,3019.69 1354.33,2940.94 1421.26,2940.94 1639.76,2722.44 U1.28@1639.76,2627.95
G3: P1.6 U1.26 | length 730
  Top Layer w8: P1.6@1324.8,3199.61 1370.08,3154.33 1370.08,3039.37 1409.45,3000 1429.13,3000 1679.13,2750 U1.26@1679.13,2627.95
G4: P1.8 U1.24 | length 693.3
  Top Layer w8: P1.8@1424.8,3199.61 1472.44,3151.97 1472.44,3027.56 1718.5,2781.5 U1.24@1718.5,2627.95
G5: P1.10 U1.22 | length 668.2
  Top Layer w8: P1.10@1524.8,3199.61 1574.8,3149.61 1574.8,3003.94 1757.87,2820.87 U1.22@1757.87,2627.95
G6: P1.12 U1.20 | length 643.1
  Top Layer w8: P1.12@1624.8,3199.61 1673.23,3151.18 1673.23,3070.86 1673.23,2986.22 1797.24,2862.2 U1.20@1797.24,2627.95
G7: P1.14 U1.10 | length 1033.5
  Top Layer w8: P1.14@1724.8,3199.61 1775.59,3148.82 1775.59,3076.7 1876,2976.3 2001.7,2976.3 2027.56,2950.44 2027.56,2484.25 1982.28,2438.98 U1.10@1927.17,2438.98
G8: P1.16 U1.8 | length 1025.7
  Top Layer w8: P1.16@1824.8,3175.2 1874.02,3125.98 1874.02,3073.99 1937,3011.01 2026.92,3011.01 2066.93,2971 2066.93,2472.44 1994.09,2399.61 U1.8@1927.17,2399.61